# Altium PCB 2layer.PcbDoc
Units mm, origin at the board's own origin, x right, y up, seen from the top; angles counter-clockwise.
Board outline 53.83 x 49.4 mm, 2 copper layers (Top Layer, Bottom Layer); 25 components, 60 nets, 165 pads, 34 vias.
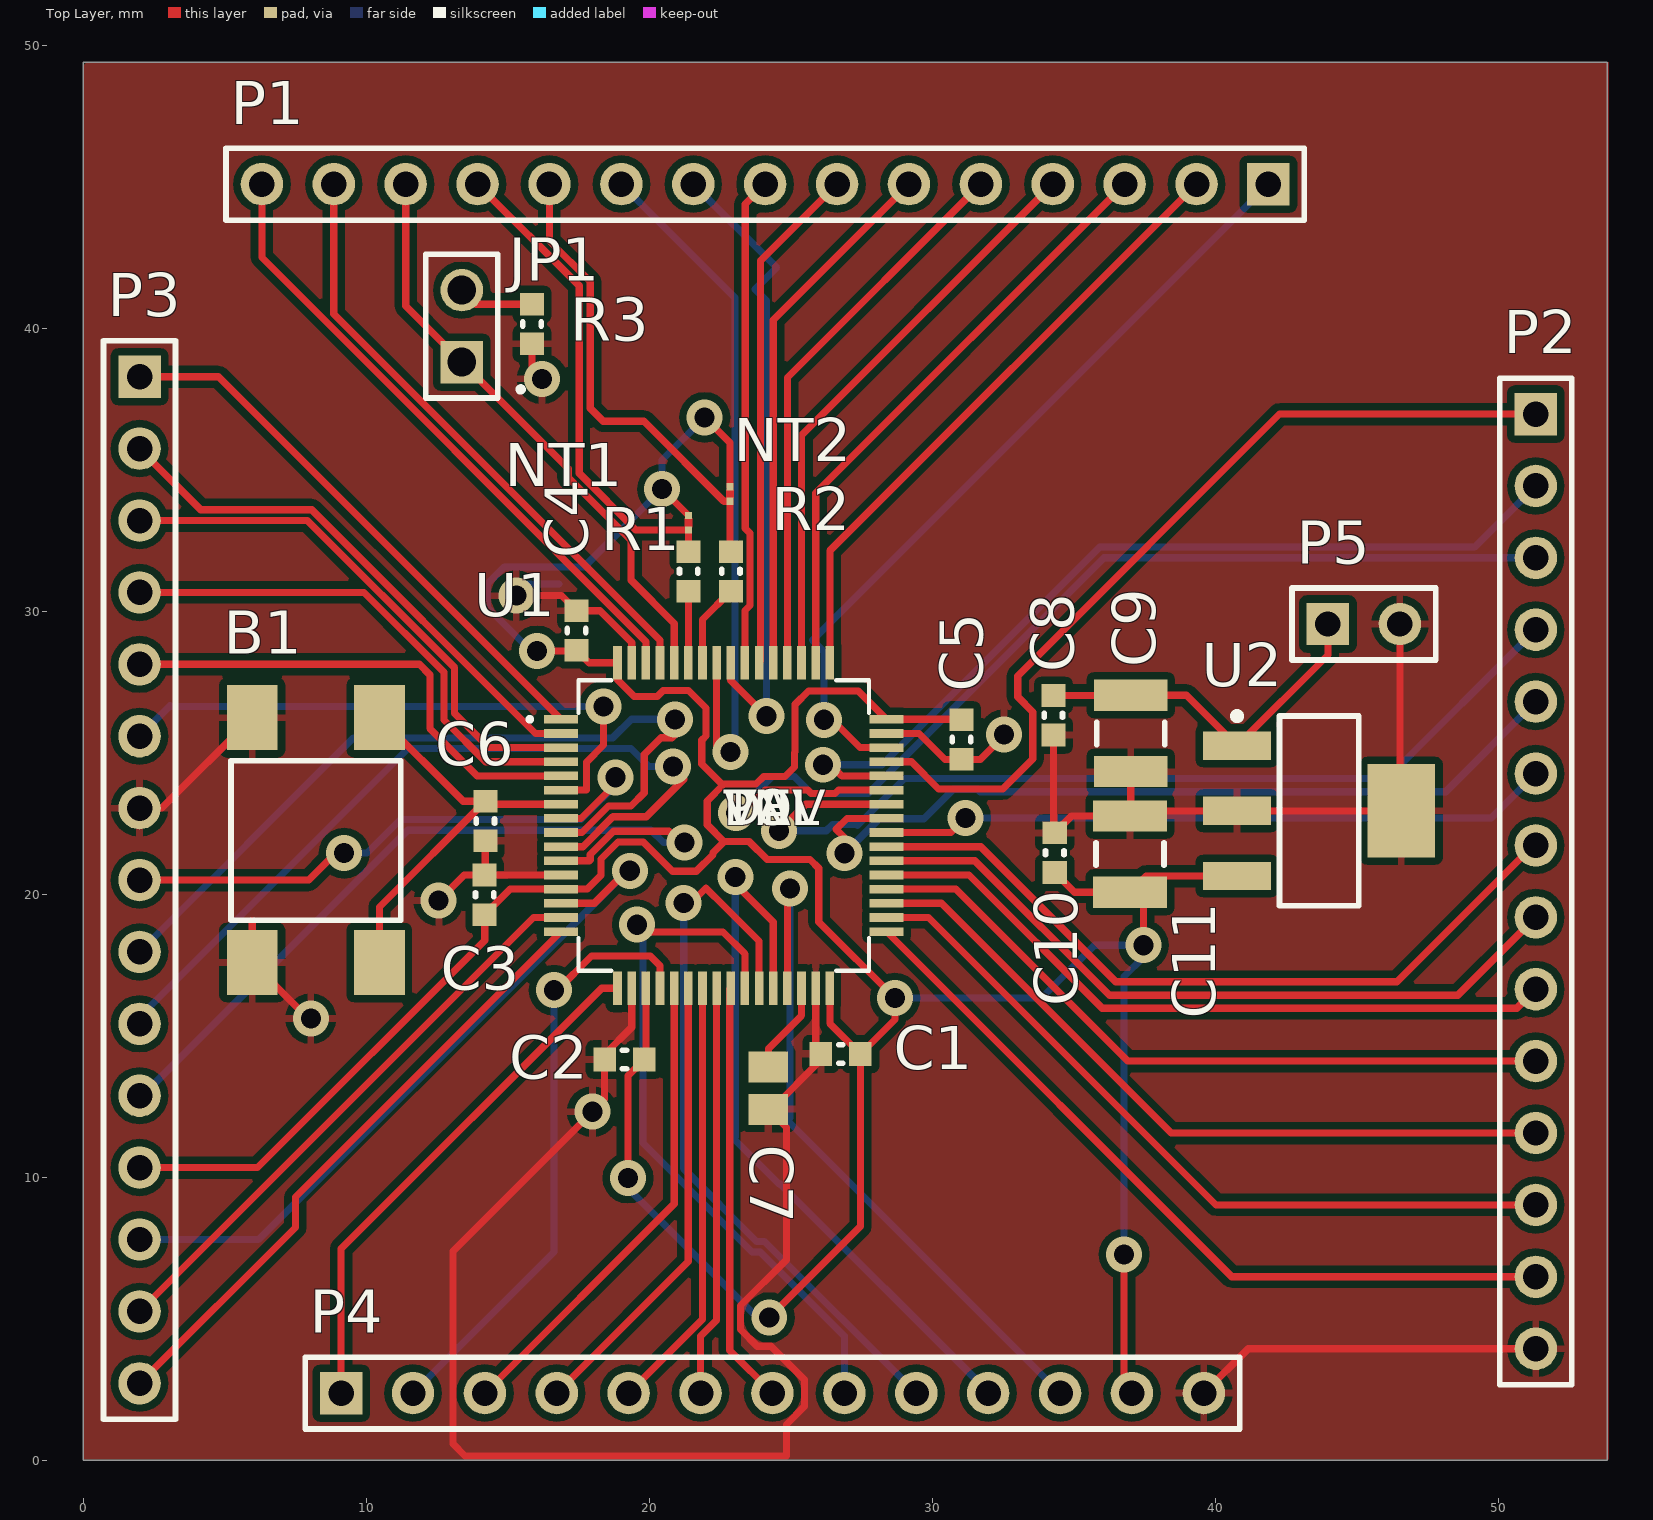
[diagram p0: Top Layer view]
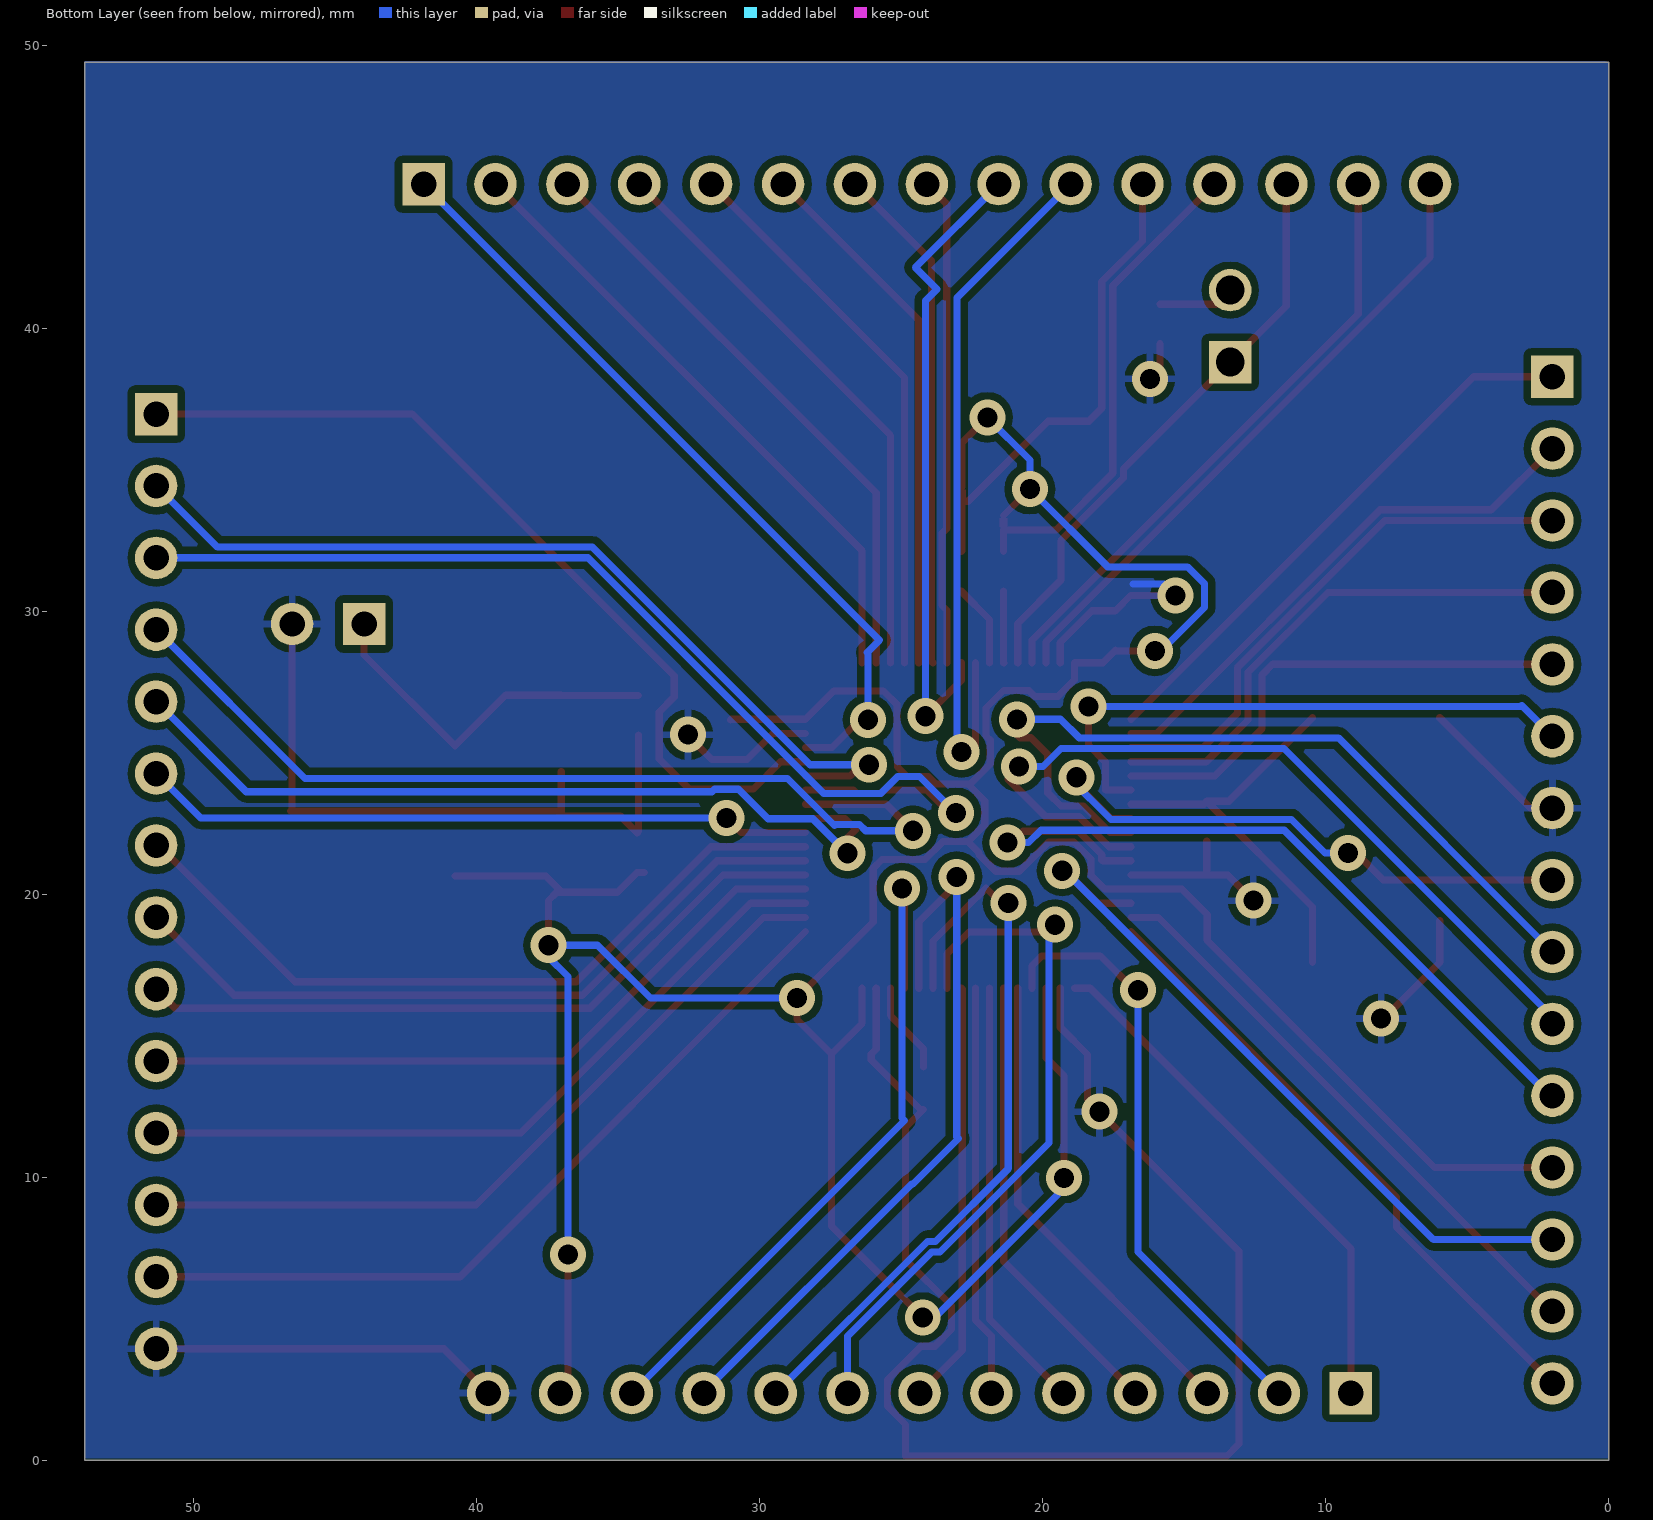
[diagram p1: Bottom Layer view, seen from below]

## Layer stack, top to bottom
Top Solder: solder mask 0.0102, Solder Resist, Dk 3.5
Top Layer: signal copper 0.0356
Dielectric 1: dielectric 0.32, FR-4, Dk 4.8
Bottom Layer: signal copper 0.0356
Bottom Solder: solder mask 0.0102, Solder Resist, Dk 3.5

## Board outline
-0.001,0.001 53.829,0.001 53.829,49.397 -0.001,49.397

## Design rules (kind name [scope] priority, off if disabled: settings)
Clearance [All] p1: gap=0.254 ignorepadtopadclearanceinfootprint=FALSE except(0: Arc-Hole Track-Hole SMDPad-Hole THPad-Hole Via-Hole Fill-Hole Poly-Hole Region-Hole Text-Hole; 0.124: Arc-Arc Arc-Track Arc-SMDPad Track-Track Track-SMDPad SMDPad-SMDPad)
PolygonConnect [All] p1: connectstyle=Relief reliefconductorwidth=0.254 reliefentries=4 polygonreliefangle="90 Angle" airgapwidth=0.254
RoutingVias [All] p1: holewidth=0.711 width=1.27 viastyle="Through Hole" minholewidth=0.711 minwidth=1.27 maxholewidth=0.711 maxwidth=1.27
SolderMaskExpansion [All] p1: expansion=0.102
Width [All] p1: maxlimit=0.254 minlimit=0.254 preferedwidth=0.254
30 further rules are at their usual default settings.

## Classes and differential pairs
component class Power: C8 C9 C10 C11 P5 U2
component class breakout_board_M4: B1 C1 C2 C3 C4 C5 C6 C7 JP1 NT1 NT2 P1 P2 P3 P4 R1 R2 R3 U1

## Components (designator, comment, footprint, x,y, rotation, side; value= is the part's Value field where it differs from the comment)
B1 "USER (Blue)" PB-6X6mm-Blue 8.216,21.912 r90 top
C1 "C0603C104K8RACTU" 0603L 26.752,14.354 r180 top value=0.1uF
C2 "C0603C104K8RACTU" 0603L 19.114,14.164 r180 top value=0.1uF
C3 "C0603C104K8RACTU" 0603L 14.177,19.979 r90 top value=0.1uF
C4 "C0603C104K8RACTU" 0603L 17.42,29.318 r90 top value=0.1uF
C5 "C0603C104K8RACTU" 0603L 31.025,25.463 r270 top value=0.1uF
C6 "C0603C104K8RACTU" 0603L 14.201,22.584 r90 top value=0.1uF
C7 "GRM21BR71A475KA73L" 0805L 24.201,13.149 r90 top value=4.7uF
C8 "C0603C104J4RACTU" 0603L 34.269,26.323 r270 top value=0.1uF
C9 "GRM32ER71H106KA12L" 1210L 37.001,25.68 r270 top value=10uF
C10 "C0603C104J4RACTU" 0603L 34.317,21.465 r90 top value=0.1uF
C11 "GRM32ER71H106KA12L" 1210L 36.976,21.419 r90 top value=10uF
JP1 "" HDR_1x2_2R54_V_M_S 13.369,38.8 r90 top
NT1 "Net-Tie" Net-Tie_10mil 21.381,33.123 r270 top net-tie
NT2 "Net-Tie" Net-Tie_10mil 22.845,34.139 r90 top net-tie
P1 "" HDR1X15 41.867,45.086 r180 top
P2 "" HDR1X14 51.312,36.964 r270 top
P3 "" HDR1X15 1.984,38.281 r270 top
P4 "" HDR1X13 9.105,2.376 r0 top
P5 "" HDR1X2 43.969,29.546 r0 top
R1 "CRCW06031K00JNEA" 0603L 21.384,31.405 r90 top value=1.0k
R2 "CRCW06031K00JNEA" 0603L 22.873,31.405 r90 top value=1.0k
R3 "CRCW060310K0JNEA" 0603L 15.85,40.144 r90 top value=10k
U1 "*" LQFP64-10x10mm 22.622,22.43 r0 top
U2 "TPS7B6933QDCYRQ1" DCY0004A_N 43.659,22.943 r0 top

## Footprints (in the part's own frame and the unit in brackets; to place one, negate y for a bottom-side part, rotate by r counter-clockwise, add the part's x,y. Pads: shape width x height; smd on the part's side, far side on the other; paste and mask are expansions set on the pad)
0603L [mm]
  rect 0.8x0.85 smd: 1(-0.7,0) 2(0.7,0)
  silkscreen extent -0.07,-0.33 0.07,0.33, body extent -0.87,-0.47 0.87,0.47, height 0.85
0805L [mm]
  rect 1.1x1.4 smd: 1(-0.75,0) 2(0.75,0)
  body extent -1.1,-0.72 1.1,0.72, height 1.1
1210L [mm]
  rect 1.1x2.6 smd: 1(-1.35,0) 2(1.35,0)
  silkscreen extent -0.4,-1.2 0.4,1.2, body extent -1.7,-1.35 1.7,1.35, height 1.35
DCY0004A_N [mm]
  rect 2.4x1 smd: 1(-2.9,2.3) 2(-2.9,0) 3(-2.9,-2.3)
  rect 2.4x3.3 smd: 4(2.9,0)
  silkscreen extent -3.02,-3.35 1.4,3.47, body extent -3.5,-3.25 3.5,3.25, height 1.62
HDR1X2 [mm] "Connector; Header; 2 Position"
  rect 1.5x1.5 hole 0.9: 1(0,0)
  round 1.5 hole 0.9: 2(2.54,0)
  silkscreen extent -1.27,-1.27 3.81,1.27
HDR1X13 [mm] "Connector; Header; 13 Position"
  rect 1.5x1.5 hole 0.9: 1(0,0)
  round 1.5 hole 0.9: 2(2.54,0) 3(5.08,0) 4(7.62,0) 5(10.16,0) 6(12.7,0) 7(15.24,0) 8(17.78,0) 9(20.32,0) 10(22.86,0) 11(25.4,0) 12(27.94,0) 13(30.48,0)
  silkscreen extent -1.27,-1.27 31.75,1.27
HDR1X14 [mm] "Connector; Header; 14 Position"
  rect 1.5x1.5 hole 0.9: 1(0,0)
  round 1.5 hole 0.9: 2(2.54,0) 3(5.08,0) 4(7.62,0) 5(10.16,0) 6(12.7,0) 7(15.24,0) 8(17.78,0) 9(20.32,0) 10(22.86,0) 11(25.4,0) 12(27.94,0) 13(30.48,0) 14(33.02,0)
  silkscreen extent -1.27,-1.27 34.29,1.27
HDR1X15 [mm] "Connector; Header; 15 Position"
  rect 1.5x1.5 hole 0.9: 1(0,0)
  round 1.5 hole 0.9: 2(2.54,0) 3(5.08,0) 4(7.62,0) 5(10.16,0) 6(12.7,0) 7(15.24,0) 8(17.78,0) 9(20.32,0) 10(22.86,0) 11(25.4,0) 12(27.94,0) 13(30.48,0) 14(33.02,0) 15(35.56,0)
  silkscreen extent -1.27,-1.27 36.83,1.27
HDR_1x2_2R54_V_M_S [mm] "Male Header, Pitch 2.54mm, 4x1 Position, Mated Height 6mm, Tail Length 3mm"
  rect 1.5x1.5 hole 1.02: 1(0,0)
  round 1.5 hole 1.02: 2(2.54,0)
  silkscreen extent -1.27,-2.14 3.81,1.27, body extent -1.27,-1.27 3.81,1.27, height 9
LQFP64-10x10mm [mm]
  rect 1.194x0.305 smd: 1(-5.75,3.75) 2(-5.75,3.25) 3(-5.75,2.75) 4(-5.75,2.25) 5(-5.75,1.75) 6(-5.75,1.25) 7(-5.75,0.75) 8(-5.75,0.25) 9(-5.75,-0.25) 10(-5.75,-0.75) 11(-5.75,-1.25) 12(-5.75,-1.75) 13(-5.75,-2.25) 14(-5.75,-2.75) 15(-5.75,-3.25) 16(-5.75,-3.75) 33(5.75,-3.75) 34(5.75,-3.25) 35(5.75,-2.75) 36(5.75,-2.25) 37(5.75,-1.75) 38(5.75,-1.25) 39(5.75,-0.75) 40(5.75,-0.25) 41(5.75,0.25) 42(5.75,0.75) 43(5.75,1.25) 44(5.75,1.75) 45(5.75,2.25) 46(5.75,2.75) 47(5.75,3.25) 48(5.75,3.75)
  rect 0.305x1.194 smd: 17(-3.75,-5.75) 18(-3.25,-5.75) 19(-2.75,-5.75) 20(-2.25,-5.75) 21(-1.75,-5.75) 22(-1.25,-5.75) 23(-0.75,-5.75) 24(-0.25,-5.75) 25(0.25,-5.75) 26(0.75,-5.75) 27(1.25,-5.75) 28(1.75,-5.75) 29(2.25,-5.75) 30(2.75,-5.75) 31(3.25,-5.75) 32(3.75,-5.75) 49(3.75,5.75) 50(3.25,5.75) 51(2.75,5.75) 52(2.25,5.75) 53(1.75,5.75) 54(1.25,5.75) 55(0.75,5.75) 56(0.25,5.75) 57(-0.25,5.75) 58(-0.75,5.75) 59(-1.25,5.75) 60(-1.75,5.75) 61(-2.25,5.75) 62(-2.75,5.75) 63(-3.25,5.75) 64(-3.75,5.75)
  silkscreen extent -6.93,-5.13 5.13,5.13, body extent 0,0 0.25,0.25, height 0.25
Net-Tie_10mil [mil]
  rect 10x10 smd paste-5 mask-5: 1(-10,0) 2(10,0)
  Top Layer region: -6,5 6,5 6,-5 -6,-5
PB-6X6mm-Blue [mm] "Surface Mounting Type Tact Switch, 4-Leads, Body 6x6mm, Height 4.5mm,Blue"
  rect 2.3x1.8 smd: 1(4.325,2.25) 2(4.325,-2.25) 3(-4.325,-2.25) 4(-4.325,2.25)
  silkscreen extent -2.83,-3 2.81,3, body extent -3,-3 3,3, height 10.5

## Part data
B1: library part "SW PUSHBUTTON", "SE PUSHBUTTON"
C1 C2 C3 C4 C5 C6: "CAP, CERM, 0.1 µF, 10 V, +/- 10%, X7R, 0603", Cap_Case=0603, Manufacturer=Kemet, Supplier Part Number 1=399-1095-1-ND, TempCo=X7R, Tolerance_%=10, Value1=Unknown, Value2=10V, ValueDisplayed=0.1µF, AEC Category=Q200, AEC Qualified=?, Cap_F=0.0000001, ComponentLink1Description="Datasheet link", ComponentLink1URL=http://www.kemet.com/kemet/web/homepage/kechome.nsf/vapubfiles/F3102_Y5V.pdf/$file/F3102_Y5V.pdf, CompType=Capacitor, LatestRevisionDate=2015-12-04, MountType=SMT, PackageReference=0603, PartNumber=C0603C104K8RACTU, Polarized=N, Published=2008-06-19, Publisher="Texas Instruments", RoHS=Y, Supplier 1=Digi-Key, Supplier 2=Mouser, Supplier 3=Farnell, Supplier Part Number 2=80-C0603C104K8R, Supplier Part Number 3=1640032, SymbolVersion=2008-07-09, TaMax_C=125, TaMin_C=-55, Technology=Ceramic, U/M=EA, VDC_V=10
C7: "CAP, CERM, 4.7 µF, 10 V, +/- 10%, X7R, 0805", Cap_Case=0805, Manufacturer=MuRata, Supplier Part Number 1=GRM21BR71A475KA73L-ND, TempCo=X7R, Tolerance_%=10, Value1=Unknown, Value2=10V, ValueDisplayed=4.7µF, AEC Category=Q200, AEC Qualified=?, Cap_F=0.0000047, ComponentLink1Description="Datasheet link", ComponentLink1URL=http://search.murata.co.jp/Ceramy/PnsearchViewAction.do?HnOFG=ON&HnNFG=ON&SEL_CNT=50&sLang=en&sKey=GRM21BR71A475KA73L&x=9&y=9&search=startwith, CompType=Capacitor, LatestRevisionDate=2015-12-04, MountType=SMT, PackageReference=0805, PartNumber=GRM21BR71A475KA73L, Polarized=N, Published=2008-06-19, Publisher="Texas Instruments", RoHS=Y, Supplier 1=Digi-Key, Supplier 2=Mouser, Supplier 3=Farnell, Supplier Part Number 2=81-GRM21BR71A475KA73, Supplier Part Number 3=1845769, SymbolVersion=2008-07-09, TaMax_C=125, TaMin_C=-55, Technology=Ceramic, U/M=EA, VDC_V=10
C8 C10: "CAP, CERM, 0.1 µF, 16 V, +/- 5%, X7R, 0603", Cap_Case=0603, Manufacturer=Kemet, Supplier Part Number 1=399-1097-1-ND, TempCo=X7R, Tolerance_%=5, Value1=Unknown, Value2=16V, ValueDisplayed=0.1µF, AEC Category=Q200, AEC Qualified=?, Cap_F=0.0000001, ComponentLink1Description="Datasheet link", ComponentLink1URL=http://www.kemet.com/kemet/web/homepage/kechome.nsf/vapubfiles/F3102_Y5V.pdf/$file/F3102_Y5V.pdf, CompType=Capacitor, LatestRevisionDate=2015-12-04, MountType=SMT, PackageReference=0603, PartNumber=C0603C104J4RACTU, Polarized=N, Published=2008-06-19, Publisher="Texas Instruments", RoHS=Y, Supplier 1=Digi-Key, Supplier 2=Mouser, Supplier 3=Farnell, Supplier Part Number 2=80-C0603C104J4R, Supplier Part Number 3=1650834, SymbolVersion=2008-07-09, TaMax_C=125, TaMin_C=-55, Technology=Ceramic, U/M=EA, VDC_V=16
C9 C11: "CAP, CERM, 10 µF, 50 V, +/- 10%, X7R, 1210", Cap_Case=1210, Manufacturer=MuRata, Supplier Part Number 1=490-6544-1-ND, TempCo=X7R, Tolerance_%=10, Value1=Unknown, Value2=50V, ValueDisplayed=10µF, AEC Category=Q200, AEC Qualified=?, Cap_F=0.00001, ComponentLink1Description="Datasheet link", ComponentLink1URL=http://www.murata.com/products/catalog/pdf/c02e.pdf, CompType=Capacitor, LatestRevisionDate=2015-12-04, MountType=SMT, PackageReference=1210, PartNumber=GRM32ER71H106KA12L, Polarized=N, Published=2008-06-19, Publisher="Texas Instruments", RoHS=Y, Supplier 1=Digi-Key, Supplier 2=Mouser, Supplier Part Number 2=81-GRM32ER71H106KA2L, SymbolVersion=2008-07-09, TaMax_C=125, TaMin_C=-55, Technology=Ceramic, U/M=EA, VDC_V=50
JP1: library part JP2
NT1 NT2: "Single point connection between nets.", LatestRevisionDate=2015-10-18, LatestRevisionNote="Added Alternate PartNumber and Alternate Manufacturer parameters to appropriate components.", MountType=SMT, PackageReference=N/A, Publisher="Texas Instruments", SymbolCreator=codlsc, SymbolVersion=2009-07-01
P1 P3: library part "Header 15", "Header, 15-Pin", LatestRevisionDate=17-Jul-2002, LatestRevisionNote="Re-released for DXP Platform.", Publisher="Altium Limited"
P2: library part "Header 14", "Header, 14-Pin", LatestRevisionDate=17-Jul-2002, LatestRevisionNote="Re-released for DXP Platform.", Publisher="Altium Limited"
P4: library part "Header 13", "Header, 13-Pin", LatestRevisionDate=17-Jul-2002, LatestRevisionNote="Re-released for DXP Platform.", Publisher="Altium Limited"
P5: library part "Header 2", "Header, 2-Pin", LatestRevisionDate=17-Jul-2002, LatestRevisionNote="Re-released for DXP Platform.", Publisher="Altium Limited"
R1 R2: "RES, 1.0 k, 5%, 0.1 W, 0603", Manufacturer=Vishay-Dale, Power_W=0.1, Supplier Part Number 1=541-1.0KGCT-ND, TempCo="200 ppm/C", Tolerance_%=5, Value1=5%, Value2=0.1W, Value_Code=1k00, ValueDisplayed=1.0k, AEC Category=Q200, AEC Qualified=?, ComponentLink1Description="Datasheet link", ComponentLink1URL=http://www.vishay.com/docs/20035/dcrcwe3.pdf, CompType=Resistor, EIA_Code=E24, LatestRevisionDate=2015-11-22, MountType=SMT, PackageReference=0603, PartNumber=CRCW06031K00JNEA, Published=2008-06-26, Publisher="Texas Instruments", Res_ohm=1000, RoHS=Y, Supplier 1=Digi-Key, Supplier 2=Mouser, Supplier 3=Farnell, Supplier Part Number 2=71-CRCW0603J-1.0K-E3, Supplier Part Number 3=1652851, SymbolVersion=2009-05-29, Technology="Thick Film", U/M=EA, VDC_V=75
R3: "RES, 10 k, 5%, 0.1 W, 0603", Manufacturer=Vishay-Dale, Power_W=0.1, Supplier Part Number 1=541-10KGCT-ND, TempCo="200 ppm/C", Tolerance_%=5, Value1=5%, Value2=0.1W, Value_Code=10k0, ValueDisplayed=10k, AEC Category=Q200, AEC Qualified=?, ComponentLink1Description="Datasheet link", ComponentLink1URL=http://www.vishay.com/docs/20035/dcrcwe3.pdf, CompType=Resistor, EIA_Code=E24, LatestRevisionDate=2015-11-22, MountType=SMT, PackageReference=0603, PartNumber=CRCW060310K0JNEA, Published=2008-06-26, Publisher="Texas Instruments", Res_ohm=10000, RoHS=Y, Supplier 1=Digi-Key, Supplier 2=Mouser, Supplier 3=Farnell, Supplier Part Number 2=71-CRCW0603J-10K-E3, Supplier Part Number 3=1469749, SymbolVersion=2009-05-29, Technology="Thick Film", U/M=EA, VDC_V=75
U1: library part STM32F446RE
U2: "High Voltage Ultra Low Iq - Low Drop Out Regulator, DCY0004A", Alternate Manufacturer="Texas Instruments", ComponentLink1Description="Datasheet Link", ComponentLink1URL=http://www.ti.com/lit/ds/symlink/tps7b6933-q1.pdf, CompType=IC, LatestRevisionDate=2015-12-29, Manufacturer="Texas Instruments", MountType=SMT, PackageReference=DCY0004A, PartNumber=TPS7B6933QDCYRQ1, Publisher="Texas Instruments", SymbolCreator=Altium, SymbolVersion=2014-08-05, U/M=EA

## Via types
v1: diameter 1.27, hole 0.711, Top Layer to Bottom Layer, 34 vias

## Nets (pads, with @x,y where several pads share a name; then routed paths per layer and width w, separated by ;. In a path a pad name is that pad's centre, name@x,y a point inside that pad or via, vN(x,y) a via of type N, cw(c..) or ccw(c..) an arc to the next point about the centre after c; other vN are vias at no path point)
BOOT0: JP1.1 P1.13 U1.60 | length 20.8
  Top Layer w0.254: P1.13 11.387,40.782 JP1.1 17.139,35.03 17.139,34.712 19.352,32.499 19.352,31.089 20.872,29.569 U1.60
GND: B1.1 B1.4 C1.2 C2.2 C3.2 C4.2 C5.2 C6.1 C7.1 C8.2 C9.2 C10.2 C11.2 P2.14 P3.7 P4.13 P5.2 R3.1 U1.12 U1.18 U1.31 U1.47 U1.63 U2.2 U2.4 | length 116.2
  Top Layer w0.254: P3.7 2.77,23.041 B1.1 ; 5.966,19.06 B1.4 7.947,15.606 v1(8.037,15.606) ; v1(12.552,19.773) 13.458,20.679 C3.2 ; C6.1 14.201,20.703 C3.2 ; v1(15.296,30.549) 16.889,30.549 C4.2 18.25,30.018 19.372,28.896 U1.63 ; R3.1 15.85,38.561 v1(16.203,38.208) ; U1.12 C3.2 ; U1.18 19.372,15.299 18.414,14.341 C2.2 18.414,12.747 v1(17.983,12.316) 13.054,7.387 13.054,0.586 13.485,0.155 24.837,0.155 24.837,1.269 25.476,1.908 25.476,2.845 24.291,4.03 23.81,4.03 23.215,4.625 23.215,5.466 24.837,7.089 24.837,11.763 C7.1 24.306,12.399 26.052,14.145 C1.2 25.872,14.533 U1.31 U1.31@25.898,16.653 ; U1.47 29.522,25.68 30.438,24.763 C5.2 31.687,24.763 32.525,25.601 v1(32.525,25.636) ; C8.2 34.269,22.214 C10.2 34.921,22.769 C11.2 C11.2@37.001,22.794 ; C9.2 C11.2@37.001,22.794 ; P4.13 41.153,3.944 P2.14 ; P5.2 46.509,22.993 U2.4 U2.2 37.15,22.943 C11.2@37.001,22.794
  Bottom Layer w0.254: v1(15.296,30.549) 15.704,30.957 16.799,30.957
NetC7_2: C7.2 U1.30 | length 3.3
  Top Layer w0.254: C7.2 24.201,14.54 25.372,15.71 U1.30
NetC8_1: C8.1 C9.1 P5.1 U2.1 | length 12.9
  Top Layer w0.254: C8.1 36.994,27.023 C9.1 38.972,27.03 U2.1 43.969,28.454 P5.1
NetJP1_2: JP1.2 R3.2 | length 2.7
  Top Layer w0.254: JP1.2 13.865,40.844 R3.2
NetR1_1: R1.1 U1.59 | length 2.5
  Top Layer w0.254: U1.59 21.384,28.191 R1.1
NetR2_1: R2.1 U1.58 | length 2.9
  Top Layer w0.254: U1.58 21.872,29.704 R2.1
NRST: B1.2 B1.3 C6.2 U1.7 | length 14.9
  Top Layer w0.254: B1.3 10.466,19.549 C6.2 ; B1.2 13.419,23.284 C6.2 ; U1.7 14.305,23.18 C6.2
PA0: P3.13 U1.14 | length 26.3
  Top Layer w0.254: U1.14 18.051,19.68 v1@19.304,20.933 ; v1(19.304,20.828) v1@19.304,20.933 ; v1@19.558,21.187 v1@19.304,20.933
  Bottom Layer w0.254: P3.13 6.192,7.801 19.304,20.914 v1(19.304,20.828)
PA1: P3.14 U1.15 | length 20.7
  Top Layer w0.254: P3.14 15.902,19.18 U1.15
PA2: P3.15 U1.16 | length 22.1
  Top Layer w0.254: P3.15 7.492,8.229 7.492,9.299 U1.16
PA3: P4.1 U1.17 | length 18.7
  Top Layer w0.254: P4.1 9.105,7.475 18.31,16.68 U1.17
PA4: P4.2 U1.20 | length 21.5
  Top Layer w0.254: v1(16.628,16.609) 16.743,16.609 17.953,17.818 20.028,17.815 20.372,17.471 U1.20
  Bottom Layer w0.254: P4.2 16.628,7.36 v1(16.628,16.609)
PA5: P4.3 U1.21 | length 17.1
  Top Layer w0.254: P4.3 20.872,9.063 U1.21
PA6: P4.4 U1.22 | length 16.2
  Top Layer w0.254: P4.4 21.372,7.023 U1.22
PA7: P4.5 U1.23 | length 15.4
  Top Layer w0.254: P4.5 21.872,4.983 U1.23
PA8: P2.5 U1.41 | length 29.6
  Top Layer w0.254: v1(26.886,21.447) 26.886,22 26.592,22.294 26.977,22.68 U1.41
  Bottom Layer w0.254: v1(26.886,21.447) 26.901,21.447 28.117,22.664 29.7,22.664 30.745,23.708 31.586,23.708 31.675,23.62 48.128,23.62 P2.5
PA9: P2.4 U1.42 | length 33.9
  Top Layer w0.254: v1(24.58,22.24) 25.519,23.18 U1.42
  Bottom Layer w0.254: v1(24.58,22.24) 26.242,22.24 26.465,22.463 27.307,22.463 27.345,22.425 29.005,24.086 46.055,24.086 P2.4
PA10: P2.3 U1.43 | length 38.2
  Top Layer w0.254: v1(23.058,22.873) 23.284,22.873 24.09,23.68 25.594,23.68 25.715,23.559 26.557,23.559 26.678,23.68 U1.43
  Bottom Layer w0.254: v1(23.058,22.873) 24.344,24.16 25.114,24.16 25.715,23.559 27.729,23.559 36.054,31.884 P2.3
PA11: P2.2 U1.44 | length 31.9
  Top Layer w0.254: v1(26.136,24.575) 26.136,24.691 26.21,24.765 26.796,24.18 U1.44
  Bottom Layer w0.254: v1(26.136,24.575) 28.211,24.575 35.898,32.262 49.15,32.262 P2.2
PA12: P2.1 U1.45 | length 31.3
  Top Layer w0.254: U1.45 29.253,24.68 30.211,23.721 32.483,23.721 33.541,24.78 33.541,26.442 33.007,26.976 33.007,27.712 42.259,36.964 P2.1
PA15: P1.3 U1.50 | length 21.4
  Top Layer w0.254: U1.50 25.872,34.171 P1.3
PB0: P4.8 U1.26 | length 25.2
  Top Layer w0.254: v1(19.558,18.923) 19.743,18.923 19.997,18.669 22.596,18.669 23.372,17.893 U1.26
  Bottom Layer w0.254: v1(19.558,18.923) 19.77,18.711 19.77,11.209 23.622,7.357 23.91,7.357 26.885,4.382 P4.8
PB1: P4.9 U1.27 | length 26.2
  Top Layer w0.254: v1(21.209,19.685) 21.47,19.685 22,20.215 22.015,20.2 22.015,20.192 22.611,19.597 22.619,19.597 23.872,18.344 U1.27
  Bottom Layer w0.254: v1(21.209,19.685) 21.209,10.305 23.779,7.735 24.066,7.735 P4.9
PB2: P4.10 U1.28 | length 26.5
  Top Layer w0.254: v1(23.031,20.613) 23.031,20.361 24.372,19.02 U1.28
  Bottom Layer w0.254: v1(23.031,20.613) 23.031,11.427 22.973,11.368 24.574,9.767 24.621,9.767 31.965,2.422 P4.10
PB3: P1.8 U1.55 | length 17.3
  Top Layer w0.254: U1.55 23.372,30.024 23.549,30.201 23.549,32.756 23.381,32.924 23.381,44.38 P1.8
PB4: P1.9 U1.56 | length 23.7
  Top Layer w0.254: U1.56 22.872,27.547 v1(24.13,26.289) ; v1(24.13,26.289) v1@24.155,26.264 ; v1(24.13,26.289) 24.13,26.239 v1@24.155,26.264 ; v1@24.155,26.264 24.29,26.399 24.29,26.129 v1@24.155,26.264
  Bottom Layer w0.254: P1.9 24.493,42.14 23.725,41.373 24.13,40.968 v1(24.13,26.289)
PB5: P1.10 U1.57 | length 26
  Top Layer w0.254: U1.57 22.372,25.069 22.422,25.019 v1(22.86,25.019)
  Bottom Layer w0.254: P1.10 23.023,41.07 23.023,24.751 22.86,24.914 v1(22.86,25.019)
PB8: P1.14 U1.61 | length 21.7
  Top Layer w0.254: P1.14 8.847,40.495 20.372,28.97 U1.61
PB9: P1.15 U1.62 | length 22.5
  Top Layer w0.254: P1.15 6.307,42.495 19.872,28.93 U1.62
PB10: P4.11 U1.29 | length 25.8
  Top Layer w0.254: U1.29 24.872,20.4 24.966,20.306 v1(24.966,20.208)
  Bottom Layer w0.254: v1(24.966,20.208) 24.966,12.101 24.873,12.008 P4.11
PB12: P2.13 U1.33 | length 28
  Top Layer w0.254: U1.33 40.568,6.484 P2.13
PB13: P2.12 U1.34 | length 27.1
  Top Layer w0.254: U1.34 29.859,19.18 40.015,9.024 P2.12
PB14: P2.11 U1.35 | length 26.3
  Top Layer w0.254: U1.35 30.317,19.68 38.433,11.564 P2.11
PB15: P2.10 U1.36 | length 25.5
  Top Layer w0.254: U1.36 30.819,20.18 36.895,14.104 P2.10
PC0: P3.8 U1.8 | length 21.4
  Top Layer w0.254: P3.8 7.962,20.501 8.912,21.451 v1(9.212,21.451) ; U1.8 17.58,22.68 18.796,23.895 v1(18.796,24.13)
  Bottom Layer w0.254: v1(9.212,21.451) 10.019,21.451 11.207,22.639 17.583,22.639 18.998,24.055 18.923,24.13 v1(18.796,24.13)
PC1: P3.9 U1.9 | length 29.1
  Top Layer w0.254: U1.9 17.615,22.18 18.549,23.114 19.344,23.114 19.812,23.582 19.812,24.932 20.407,25.527 20.788,25.527 20.907,25.646 v1(20.907,26.178)
  Bottom Layer w0.254: P3.9 9.546,25.524 18.706,25.524 19.36,26.178 v1(20.907,26.178)
PC2: P3.10 U1.10 | length 29.2
  Top Layer w0.254: U1.10 17.65,21.68 18.706,22.736 19.887,22.736 21.209,24.058 20.828,24.439 v1(20.828,24.511)
  Bottom Layer w0.254: P3.10 1.984,15.66 11.47,25.146 19.344,25.146 19.979,24.511 v1(20.828,24.511)
PC3: P3.11 U1.11 | length 29.5
  Top Layer w0.254: U1.11 17.869,21.18 17.91,21.221 17.91,21.405 18.727,22.222 20.682,22.222 v1@20.831,22.073 ; v1@20.831,22.073 21.233,21.671 v1(21.233,21.824) 21.233,21.912 21.394,22.073 v1@20.831,22.073
  Bottom Layer w0.254: P3.11 2.079,12.881 11.458,22.261 20.056,22.261 20.493,21.824 v1(21.233,21.824)
PC4: P4.6 U1.24 | length 14.5
  Top Layer w0.254: P4.6 21.805,4.382 22.372,4.949 U1.24
PC5: P4.7 U1.25 | length 14.9
  Top Layer w0.254: U1.25 22.837,16.645 22.837,3.884 P4.7
PC6: P2.9 U1.37 | length 25.2
  Top Layer w0.254: U1.37 31.285,20.68 35.994,15.97 50.638,15.97 P2.9
PC7: P2.8 U1.38 | length 26.1
  Top Layer w0.254: U1.38 31.495,21.18 36.247,16.427 48.556,16.427 P2.8
PC8: P2.7 U1.39 | length 26.9
  Top Layer w0.254: U1.39 28.375,21.676 31.586,21.676 31.59,21.68 31.705,21.68 36.475,16.909 46.406,16.909 51.221,21.724 P2.7
PC9: P2.6 U1.40 | length 23.8
  Top Layer w0.254: U1.40 30.653,22.18 v1(31.166,22.692)
  Bottom Layer w0.254: v1(31.166,22.692) 49.741,22.692 P2.6
PC10: P1.4 U1.51 | length 20.6
  Top Layer w0.254: U1.51 25.372,36.211 P1.4
PC11: P1.5 U1.52 | length 19.7
  Top Layer w0.254: U1.52 24.872,38.251 P1.5
PC12: P1.6 U1.53 | length 18.9
  Top Layer w0.254: U1.53 24.372,40.291 P1.6
PC13: P3.2 U1.2 | length 19.1
  Top Layer w0.254: P3.2 4.146,33.579 8.07,33.579 15.969,25.68 U1.2
PC14: P3.3 U1.3 | length 19.2
  Top Layer w0.254: P3.3 7.913,33.201 13.116,27.998 13.116,26.389 14.325,25.18 U1.3
PC15: P3.4 U1.4 | length 18.4
  Top Layer w0.254: P3.4 9.918,30.661 12.738,27.842 12.738,26.159 14.218,24.68 U1.4
PD2: P1.7 U1.54 | length 18
  Top Layer w0.254: U1.54 23.927,28.234 23.927,42.386 P1.7
PH0: P3.5 U1.5 | length 17.6
  Top Layer w0.254: P3.5 11.871,28.121 12.24,27.752 12.24,25.851 13.912,24.18 U1.5
PH1: P3.6 U1.6 | length 21
  Top Layer w0.254: U1.6 17.78,23.68 17.78,24.675 18.378,25.273 v1(18.378,26.633)
  Bottom Layer w0.254: P3.6 3.072,26.67 3.11,26.633 v1(18.378,26.633)
SCL: NT2.1 P1.11 R2.2 | length 16.6
  Top Layer w0.254: P1.11 16.467,43.08 17.904,41.643 17.904,37.171 18.365,36.71 19.802,36.71 22.627,33.885 NT2.1 22.845,32.132 R2.2
SDA: NT1.2 P1.12 R1.2 | length 17.2
  Top Layer w0.254: P1.12 17.517,41.496 17.517,34.868 19.516,32.869 NT1.2 21.381,32.107 R1.2
SWCLK: P1.2 U1.49 | length 22.3
  Top Layer w0.254: U1.49 26.372,32.131 P1.2
SWDIO: P1.1 U1.46 | length 28.8
  Top Layer w0.254: v1(26.162,26.162) 26.162,26.309 26.196,26.343 26.162,26.376 26.202,26.416 27.438,25.18 U1.46
  Bottom Layer w0.254: v1(26.162,26.162) 26.162,28.504 26.196,28.537 25.757,28.976 P1.1
VBAT: P3.1 U1.1 | length 19.9
  Top Layer w0.254: P3.1 4.77,38.281 U1.1
VDD: C1.1 C2.1 C3.1 C4.1 C5.1 C10.1 C11.1 NT1.1 NT2.2 P3.12 P4.12 U1.13 U1.19 U1.32 U1.48 U1.64 U2.3 | length 144.4
  Top Layer w0.254: P3.12 6.152,10.341 14.177,18.366 C3.1 15.077,20.18 U1.13 17.801,20.18 18.288,20.667 18.288,21.249 18.883,21.844 19.776,21.844 20.812,20.808 21.654,20.808 22.249,21.404 22.249,21.469 22.637,21.857 ; v1(16.026,28.595) 17.398,28.595 C4.1 17.859,28.18 U1.64 18.872,27.575 19.457,26.99 20.282,26.99 20.487,27.194 21.383,27.194 21.994,26.583 21.994,25.59 21.844,25.44 21.844,24.598 22.553,23.889 22.637,23.889 ; v1(19.24,9.972) 19.24,13.59 C2.1 19.872,14.221 U1.19 ; v1(20.445,34.313) NT1.1 ; v1(21.949,36.843) 22.845,35.947 NT2.2 ; v1(24.231,5.046) 27.452,8.266 C1.1 ; U1.32 26.372,15.433 C1.1 ; C5.1 31.008,26.18 U1.48 27.373,27.178 25.614,27.178 25.146,26.71 25.146,25.022 25.12,24.995 25.12,24.493 24.786,24.16 24.036,24.16 23.766,23.889 22.637,23.889 ; C10.1@34.068,20.765 C10.1 35.014,20.069 C11.1 ; v1(36.768,7.272) 36.768,2.654 P4.12 ; v1(37.45,18.198) 37.45,19.776 37.158,20.069 C11.1 ; U2.3 37.55,20.643 C11.1 ; 22.637,21.857 22.042,22.452 22.042,23.294 22.637,23.889 ; 22.637,21.857 23.526,21.857 24.159,21.224 25,21.224 25.672,21.224 25.982,20.915 25.982,19.019 v1(28.67,16.331) 28.67,15.572 C1.1
  Bottom Layer w0.254: v1(16.026,28.595) 15.814,28.595 14.28,30.128 14.28,30.97 14.875,31.565 17.697,31.565 v1(20.445,34.313) 20.445,35.34 v1(21.949,36.843) ; v1(19.24,9.972) 19.24,9.61 23.804,5.046 v1(24.231,5.046) ; v1(28.67,16.331) 33.853,16.331 35.721,18.198 v1(37.45,18.198) 37.45,17.776 36.768,17.094 v1(36.768,7.272)

## Polygon pours and split planes (outlines as drawn)
GND on Bottom Layer "Bottom Layer-No Net" (solid, pour order 2): 0.005,49.39 -0.002,49.383 -0.002,0.074 53.788,0.074 53.834,0.029 53.834,49.427 0.031,49.427 0,49.396
GND on Top Layer "Top Layer-No Net" (solid, pour order 4): -0.004,49.4 -0.004,0.058 -0.019,0.043 53.889,0.043 53.889,49.425 53.861,49.397 -0.003,49.397

## Text inside footprints (layer, text, board x,y; h text height)
U1: Top Overlay "TOL" at 22.622,22.43 h1.27; Top Overlay "VAL" at 22.622,22.43 h1.27; Top Overlay "DEV" at 22.622,22.43 h1.27; Top Overlay "PN" at 22.622,22.43 h1.27; Mechanical 13 "RefDes2" at 22.622,22.43 h1.27